# Altium PCB Kanaloa_v2.0.0_Loko.PcbDoc (part 1 of 2)
Units mil, origin at the board's own origin, x right, y up, seen from the top; angles counter-clockwise.
Board outline 8000 x 8000 mil, 4 copper layers (Top Layer, +24V, GND, Bottom Layer), stack 62 mil thick; 64 components, 140 nets, 806 pads, 72 vias.
Unrouted connection lines stored in the file: 9.
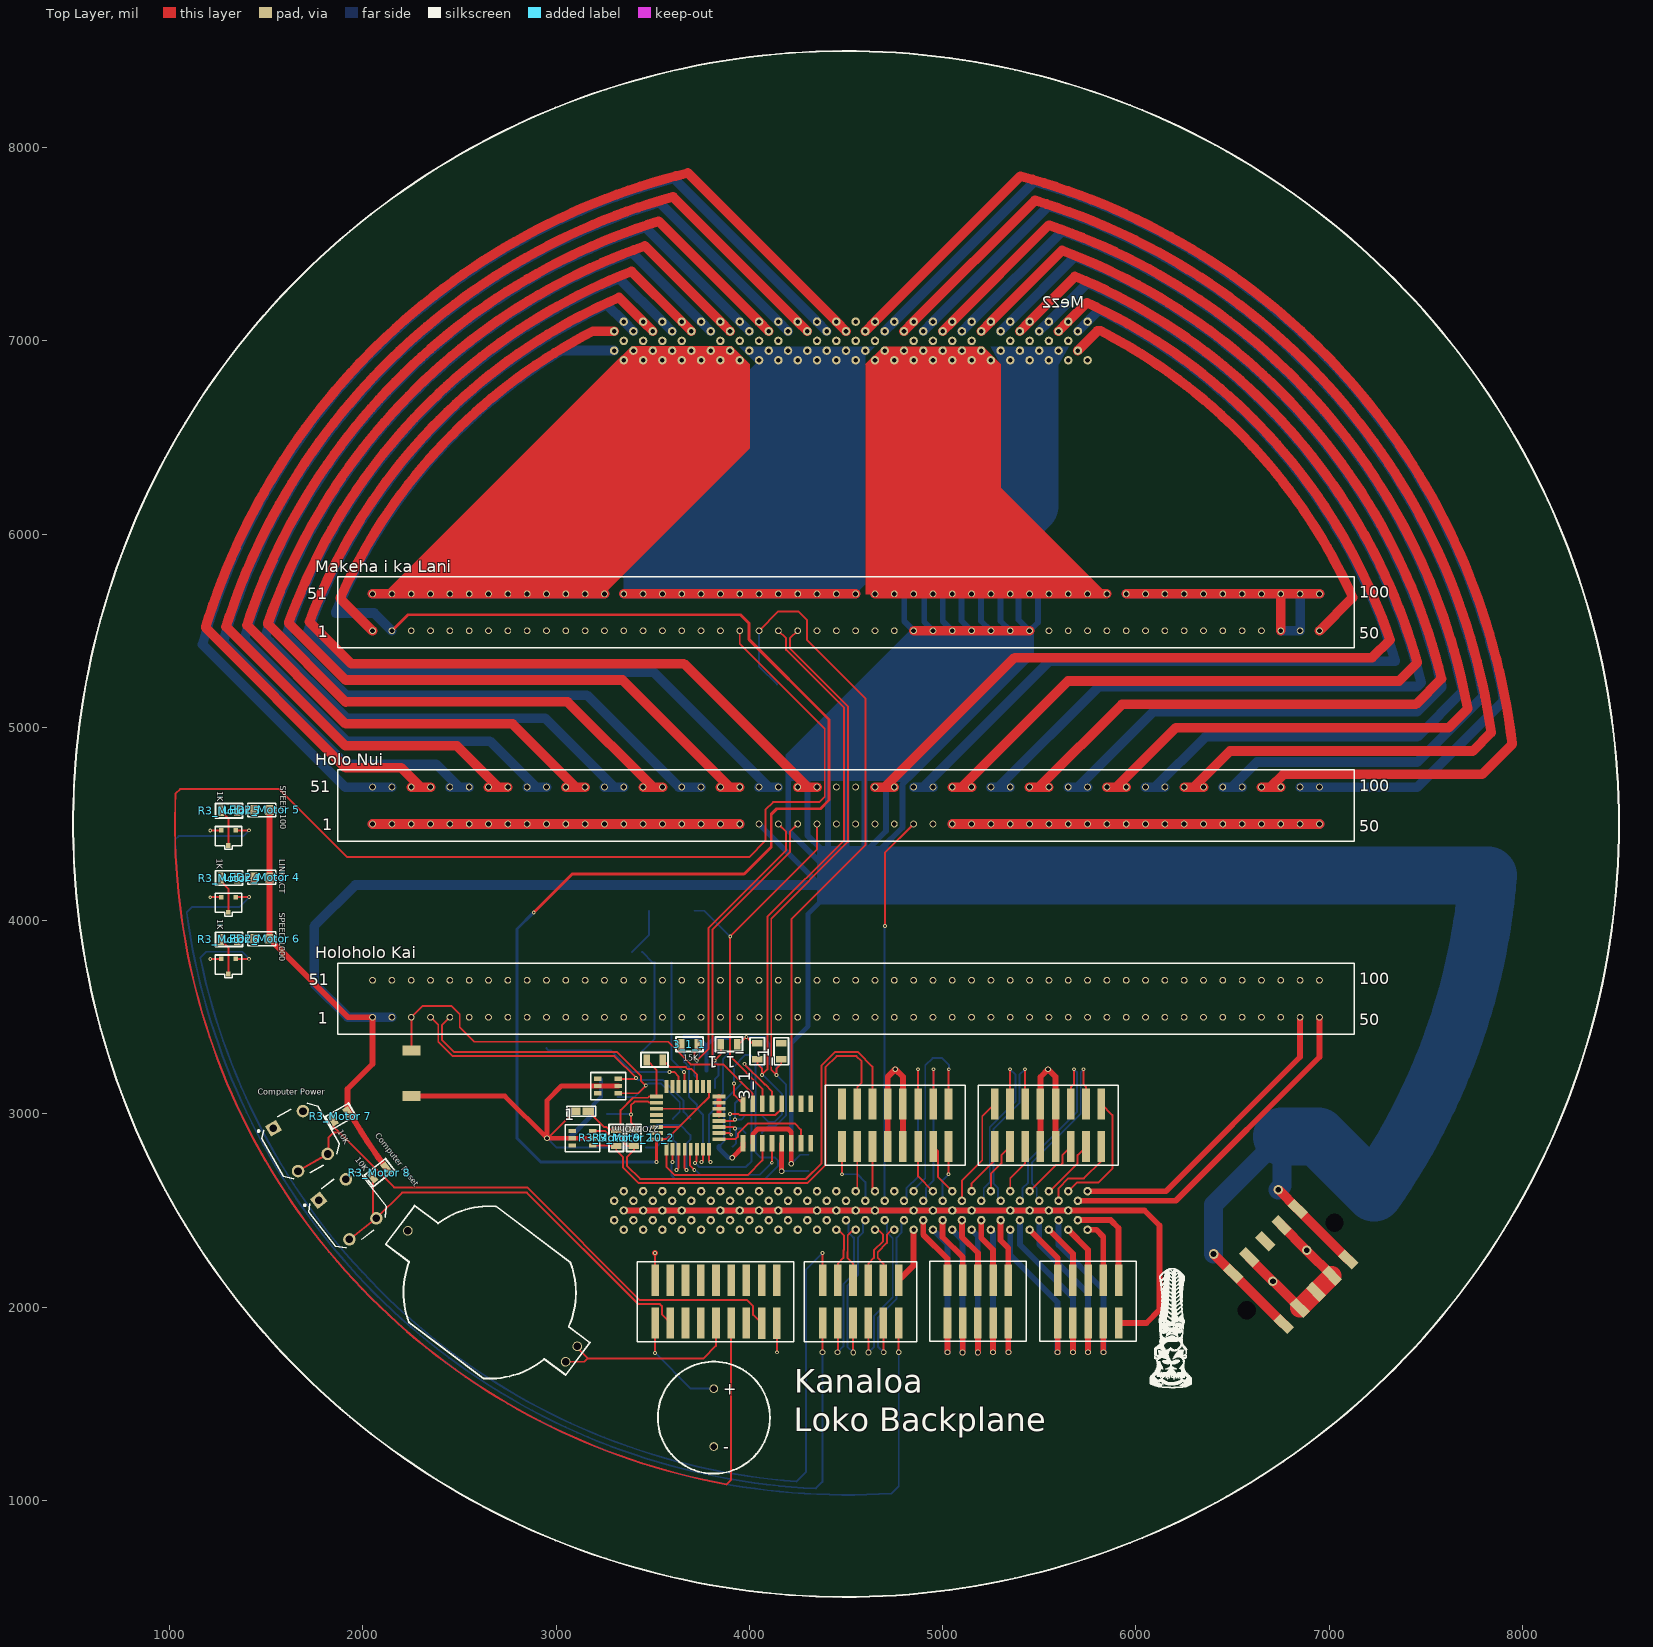
[diagram p0: Top Layer view]
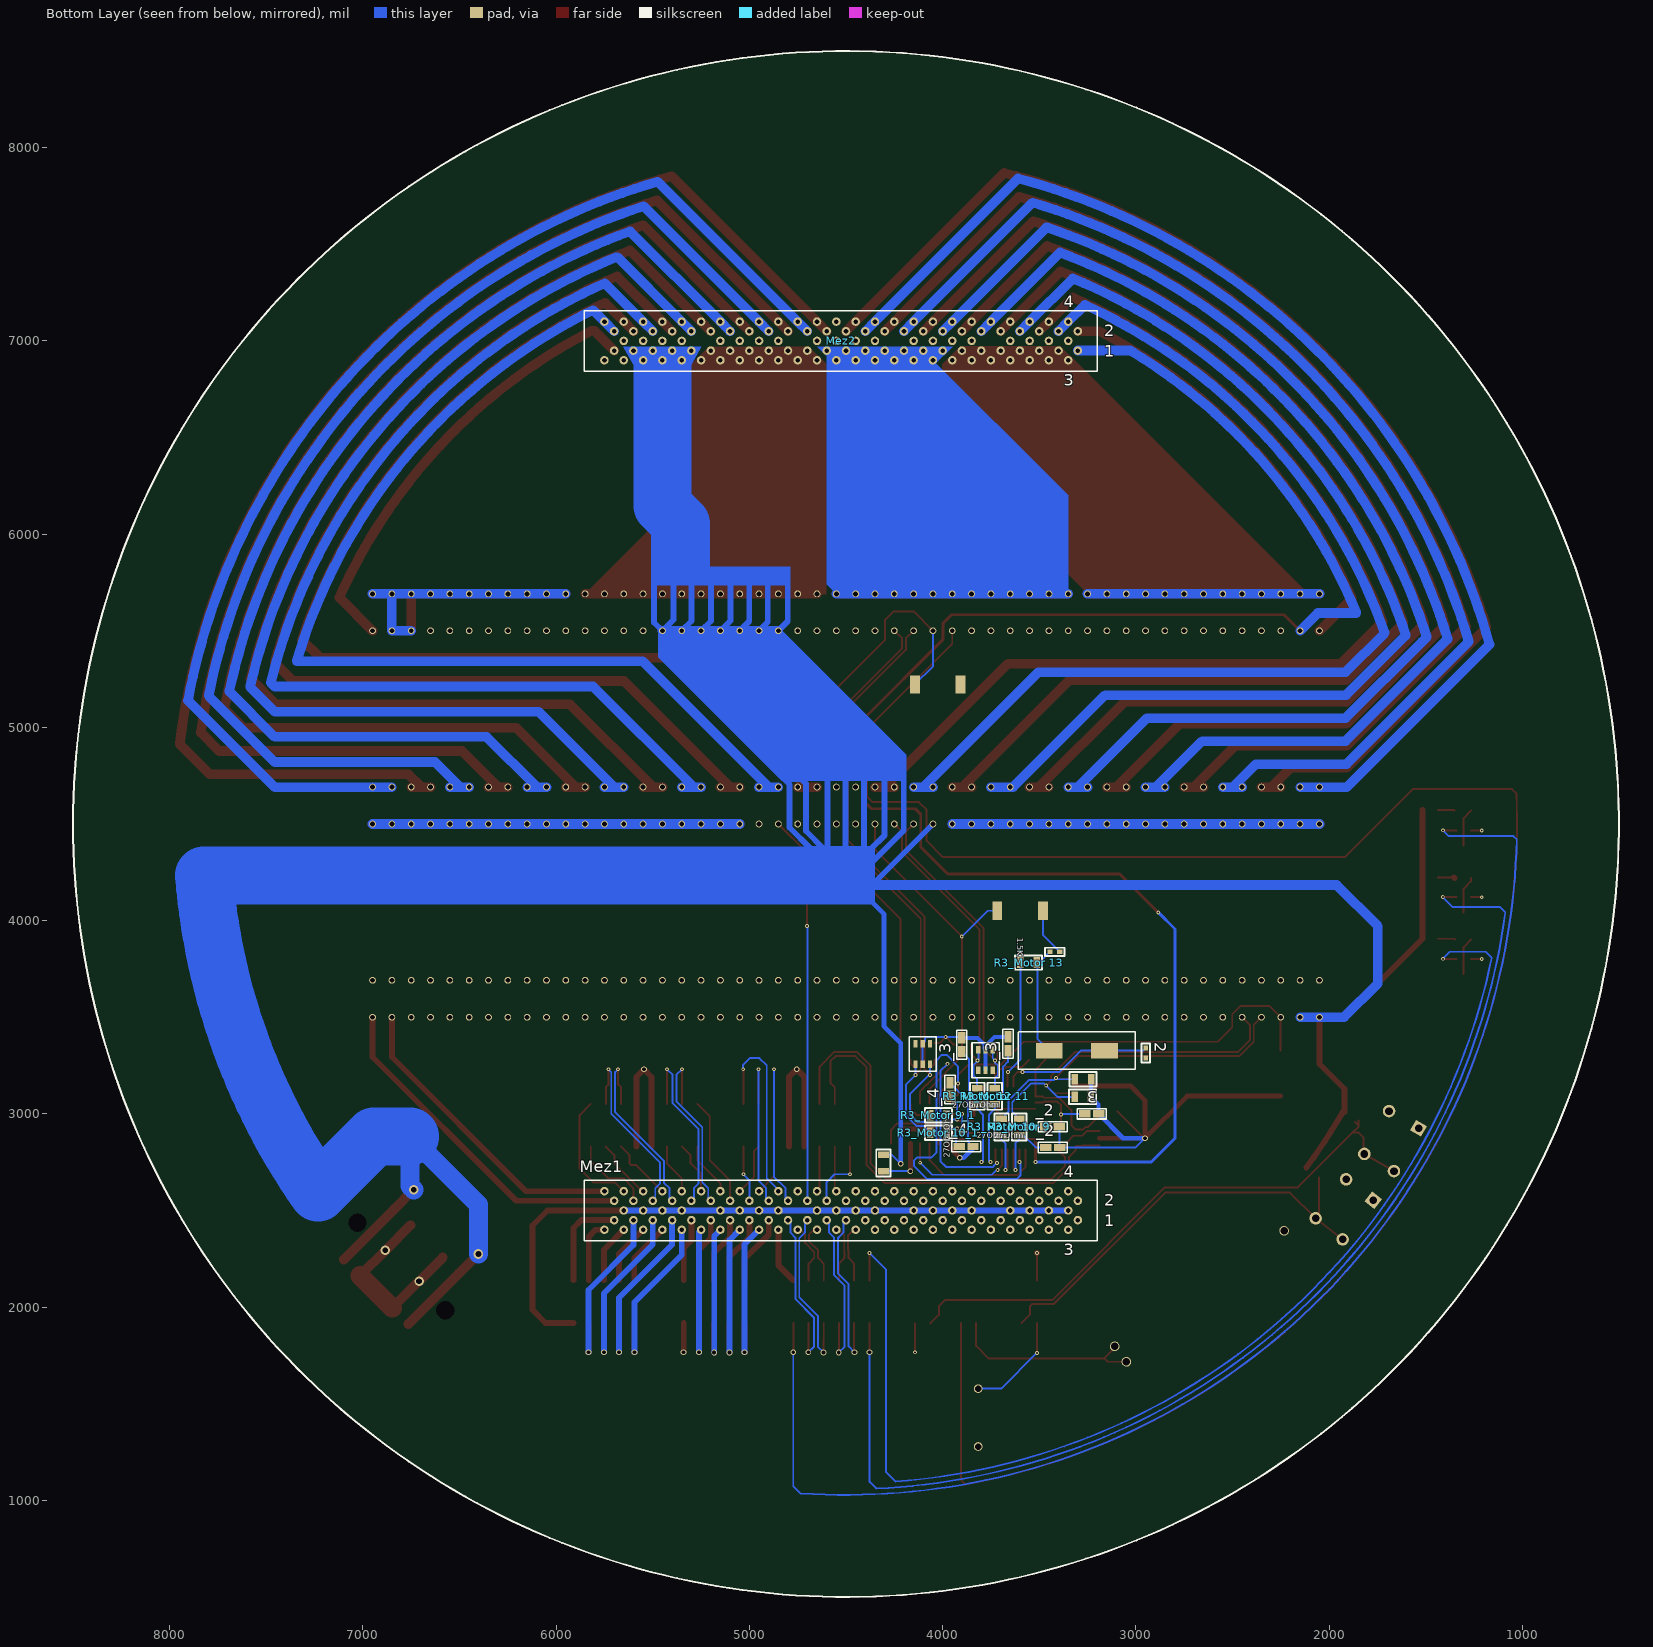
[diagram p1: Bottom Layer view, seen from below]
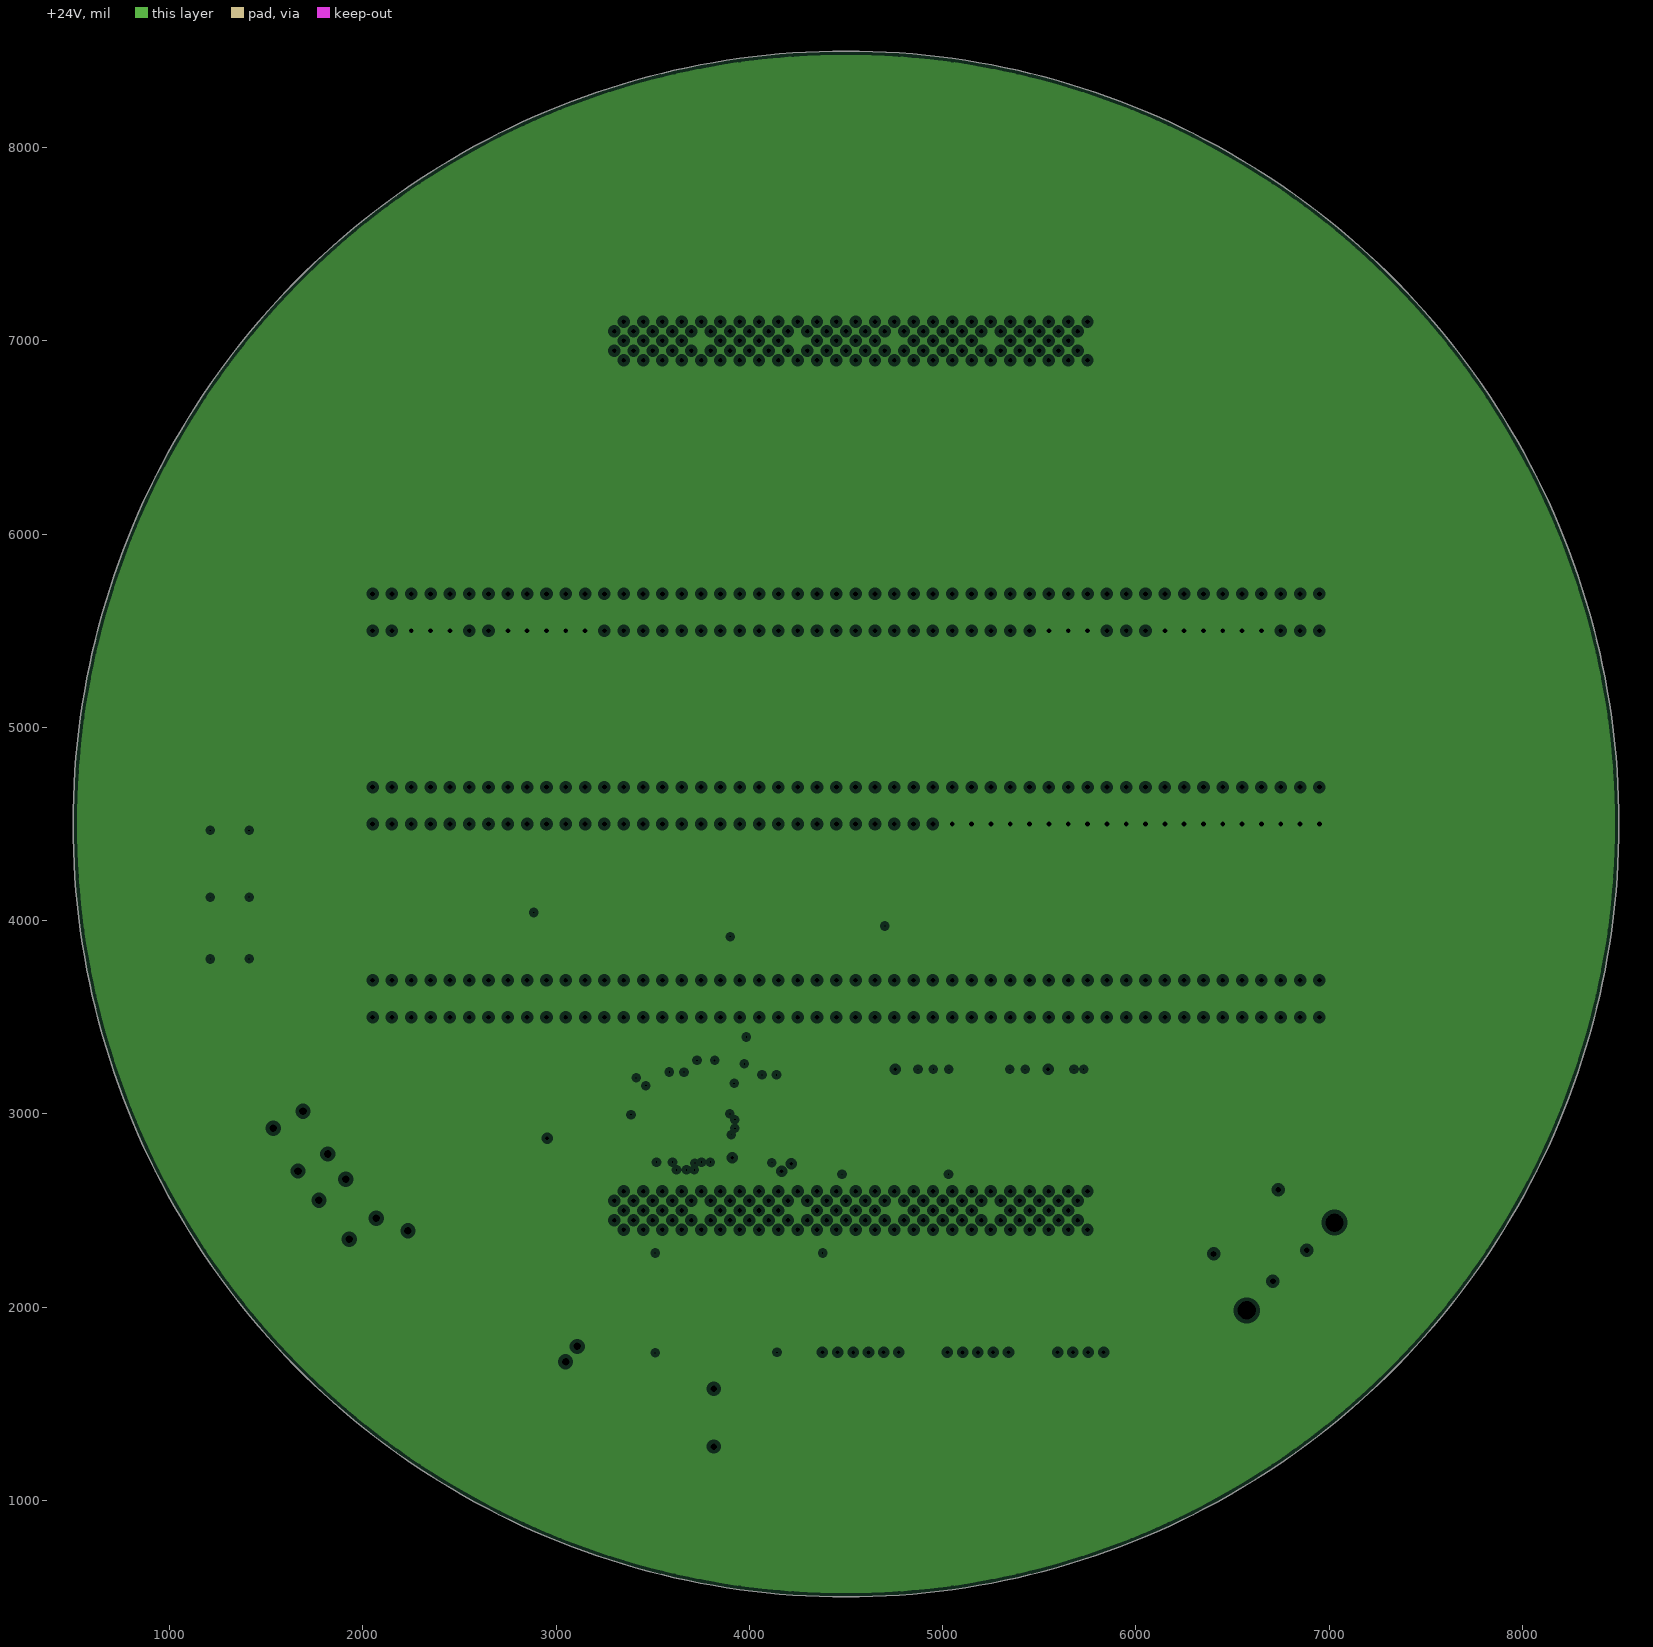
[diagram p2: +24V, clearances drawn from the general rule]
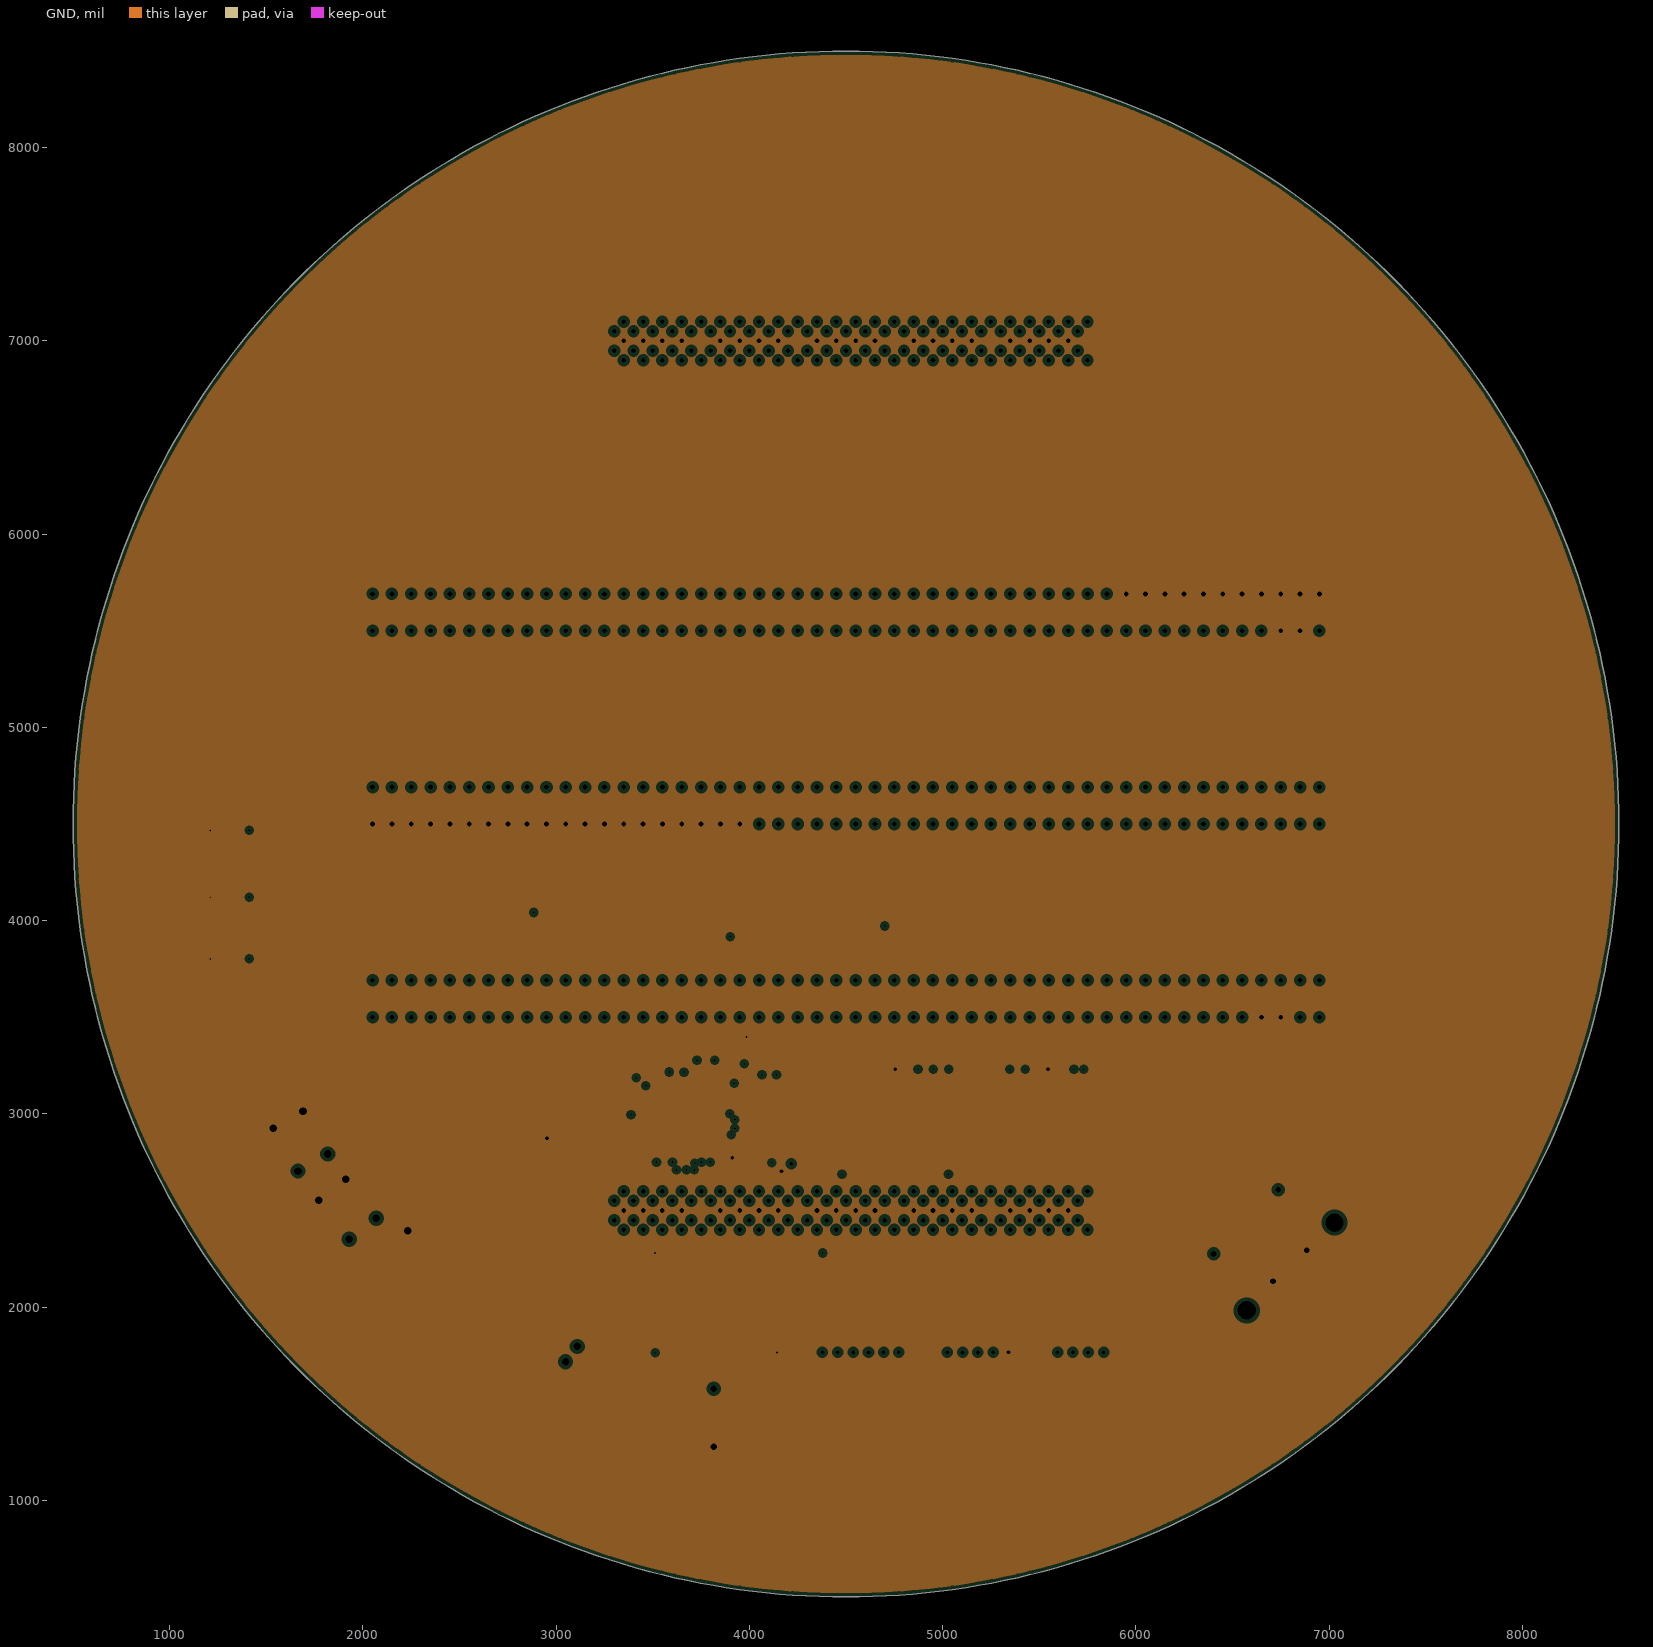
[diagram p3: GND, clearances drawn from the general rule]
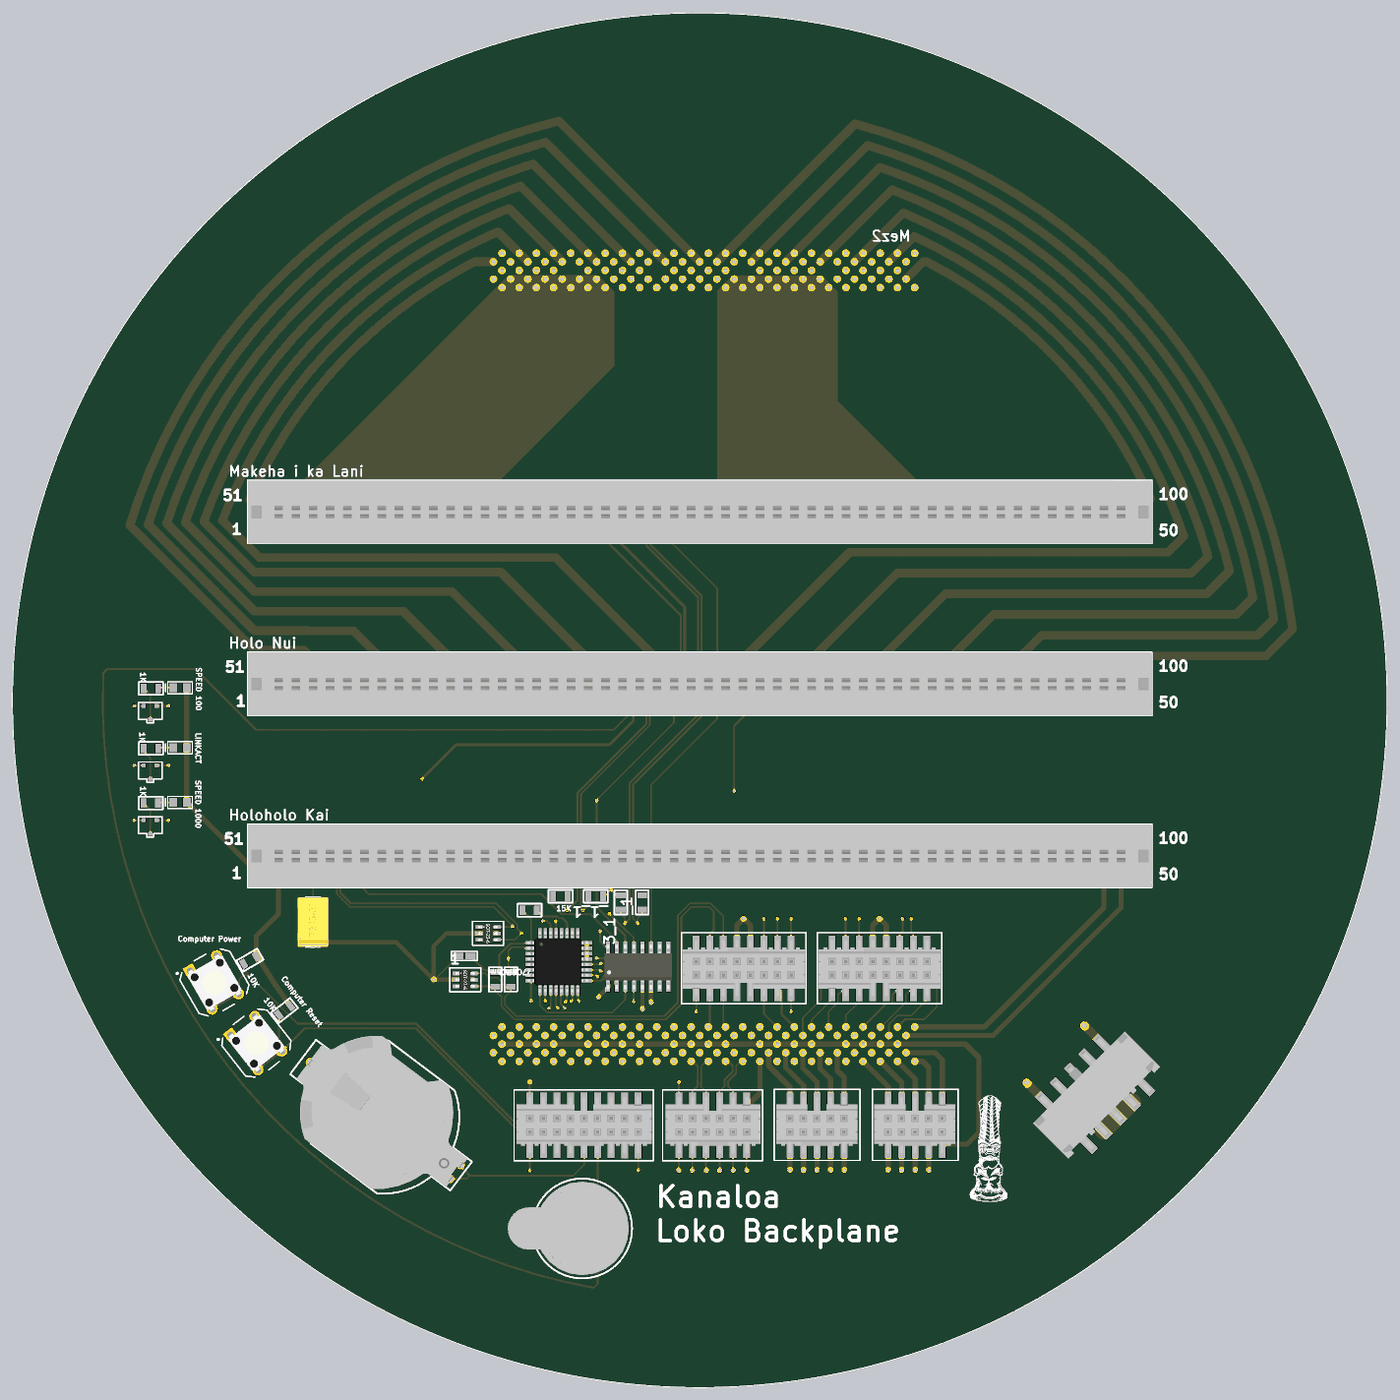
[diagram p5: 3D render of the assembled board from above, using the file's embedded part models]

## Layer stack, top to bottom
Top Layer: signal copper 1.4
Dielectric: core 8.2, FR-4, Dk 4.8
+24V: plane copper 1.4, net +24V
Dielectric: prepreg 40, FR-4, Dk 4.8
GND: plane copper 1.4, net GND
Dielectric: core 8.2, FR-4, Dk 4.8
Bottom Layer: signal copper 1.4

## Board outline
4500,500 cw(c4500,4500) 500,4500 cw(c4500,4500) 4500,8500 cw(c4500,4500) 8500,4500 cw(c4500,4500)

## Design rules (kind name [scope] priority, off if disabled: settings)
Clearance [All] p1: gap=10
DiffPairsRouting [All] p1: maxlimit=10 minlimit=10 mostfreqgap=10 maxuncoupledlength=500
PlaneClearance [All] p1: clearance=20
PlaneConnect [All] p1: planeconnectstyle=Relief reliefexpansion=20 reliefentries=4 reliefconductorwidth=10 reliefairgap=10
PolygonConnect [All] p1: connectstyle=Relief reliefconductorwidth=10 reliefentries=4 polygonreliefangle="90 Angle"
RoutingVias [All] p1: holewidth=28 width=50 viastyle="Through Hole" minholewidth=28 minwidth=50 maxholewidth=28 maxwidth=50
SilkscreenOverComponentPads [All] p1: minsilkscreentomaskgap=10
SolderMaskExpansion [All] p1: expansion=4
Width [All] p1: maxlimit=1000 minlimit=10 preferedwidth=10
24 further rules are at their usual default settings.

## Classes and differential pairs
differential pair USB_6: +USB_DP_6 -USB_DM_6
differential pair USB_7: +USB_DP_7 -USB_DM_7
differential pair USB_8: +USB_DP_8 -USB_DM_8
differential pair D: +DP3 -DM3
differential pair D2: +DP2 -DM2
differential pair D1: +DP1 -DM1
differential pair D0: +DP0 -DM0
differential pair LAN3: +LAN3 -LAN3#
differential pair LAN2: +LAN2 -LAN2#
differential pair LAN1: +LAN1 -LAN1#
differential pair LAN0: +LAN0 -LAN0#
differential pair USB_5: +USB_DP_5 -USB_DM_5
differential pair USB_4: +USB_DP_4 -USB_DM_4
differential pair USB_3: +USB_DP_3 -USB_DM_3
differential pair USB_2: +USB_DP_2 -USB_DM_2
differential pair USB_HK: +USBDP_HK -USBDM_HK
differential pair USB_HN: +USBDP_HN -USBDM_HN
differential pair USB_ML: +USBDP_ML -USBDM_ML
differential pair USB_1: +USB_DP_1 -USB_DM_1

## Components (designator, comment, footprint, x,y, rotation, side; value= is the part's Value field where it differs from the comment)
1 "" SN75240 3136,2874 r0 top
2 "27pF" "0402 (1005) CAPACITOR" 2949,3315 r270 bottom
3 "15K" "R 0805 (2012) RESISTOR" 3274,3179 r0 bottom
3_1 "15K" "R 0805 (2012) RESISTOR" 4041,3324 r90 top
3_1_1 "15K" "R 0805 (2012) RESISTOR" 3690,3360 r0 top
_1 "15K" "R 0805 (2012) RESISTOR" 4165,3324 r90 top
_1_1 "15K" "R 0805 (2012) RESISTOR" 3895,3360 r180 top
_2 "22pF" "0603 (1608) Capacitor" 3430,2826 r180 bottom
_2 "22pF" "0603 (1608) Capacitor" 3431,2933 r180 bottom
_3 "22pF" "0603 (1608) Capacitor" 3662,3363 r90 bottom
_3 "22pF" "0603 (1608) Capacitor" 3901,3358 r90 bottom
_4 "22pF" "0603 (1608) Capacitor" 3962,3126 r90 bottom
_4 "22pF" "0603 (1608) Capacitor" 3878,2831 r180 bottom
"Holo Nui" "" "AMP 5645235-3" 4500,4500 r0 top
"Holoholo Kai" "" "AMP 5645235-3" 4500,3500 r0 top
"LED2_Motor 4" "LINKACT" "LED 0805" 1477,4224 r0 top (schematic designator LED2)
"LED2_Motor 5" "SPEED 100" "LED 0805" 1477,4572.5 r0 top (schematic designator LED2)
"LED2_Motor 6" "SPEED 1000" "LED 0805" 1477,3906 r0 top (schematic designator LED2)
"Makeha i ka Lani" "" "AMP 5645235-3" 4500,5500 r0 top
Mez1 "" "TE 5536279-4" 4500,2500 r180 bottom
Mez2 "" "TE 5536279-4" 4500,7000 r180 bottom
"R3_Motor 4" "1K" "R 0805 (2012) RESISTOR" 1308,4220.53 r180 top (schematic designator R3)
"R3_Motor 5" "1K" "R 0805 (2012) RESISTOR" 1308,4569.03 r180 top (schematic designator R3)
"R3_Motor 6" "1K" "R 0805 (2012) RESISTOR" 1306.68,3902.53 r180 top (schematic designator R3)
"R3_Motor 7" "10K" "R 0805 (2012) RESISTOR" 1884,2988 r210 top (schematic designator R3)
"R3_Motor 8" "10K" "R 0805 (2012) RESISTOR" 2085,2696 r218 top (schematic designator R3)
"R3_Motor 9" "27Ohm" "R 0805 (2012) RESISTOR" 3604,2932 r270 bottom (schematic designator R3)
"R3_Motor 9_1" "27Ohm" "R 0805 (2012) RESISTOR" 4022,2993 r180 bottom (schematic designator R3)
"R3_Motor 9_2" "27Ohm" "R 0805 (2012) RESISTOR" 3311,2876 r90 top (schematic designator R3)
"R3_Motor 10" "27Ohm" "R 0805 (2012) RESISTOR" 3695,2932 r270 bottom (schematic designator R3)
"R3_Motor 10_1" "27Ohm" "R 0805 (2012) RESISTOR" 4022,2902 r180 bottom (schematic designator R3)
"R3_Motor 10_2" "27Ohm" "R 0805 (2012) RESISTOR" 3402,2876 r90 top (schematic designator R3)
"R3_Motor 11" "27Ohm" "R 0805 (2012) RESISTOR" 3730,3091 r270 bottom (schematic designator R3)
"R3_Motor 12" "27Ohm" "R 0805 (2012) RESISTOR" 3821,3091 r270 bottom (schematic designator R3)
"R3_Motor 13" "1.5K" "R 0805 (2012) RESISTOR" 3555,3783 r0 bottom (schematic designator R3)
? ".1uF" "0805 (2012) Capacitor" 4306,2746 r90 bottom
? "100uF" "2917 (7343) Capacitor" 4024.99,5222 r0 bottom
? "100uF" "2917 (7343) Capacitor" 3599.02,4051 r0 bottom
? "100uF" "2917 (7343) Capacitor" 2251,3210 r90 top
? "1.5K" "R 0805 (2012) RESISTOR" 3510,3279 r0 top
? "22pF" "0603 (1608) Capacitor" 3228,3000 r0 bottom
? "22pF" "0603 (1608) Capacitor" 3131,3013 r0 top
? "15K" "R 0805 (2012) RESISTOR" 3275,3088 r0 bottom
? "27pF" "0402 (1005) CAPACITOR" 3419,3838 r0 bottom
? "" FOXDLF/060-20 3310,3327 r0 bottom
? "" SN75240 4103,3310 r270 bottom
? "" SN75240 3778,3278 r90 bottom
? "" SN75240 3269,3144 r0 top
? "" TPS2044 4121,2950 r90 top
? "" TUSB2036 3681,2979 r0 top
? "" "10PS Header Vert" 6801,2210 r45 top
? "" 120591 2656,2076 r143 top
? "" "PUI Audio AI-1433-TWR-R" 3816,1428 r0 top
? "" "FCI 18POS" 3445.11,2028.24 r0 top
? "" BC847 1304,3763 r0 top
? "" BC847 1304,4428 r0 top
? "" BC847 1304,4082 r0 top
? "" "FCI 16pos" 5820.96,2941.24 r180 top
? "" "FCI 12POS" 4311.85,2028.24 r0 top
? "" "FCI 10POS" 5595.52,2028.24 r0 top
? "" "FCI 16pos" 5030.7,2941.24 r180 top
? "" "FCI 10POS" 5025,2028.24 r0 top
? "" B3F-1000 1677,2859 r300 top
? "" B3F-1000 1921,2506 r308 top

## Footprints (in the part's own frame and the unit in brackets; to place one, negate y for a bottom-side part, rotate by r counter-clockwise, add the part's x,y. Pads: shape width x height; smd on the part's side, far side on the other; paste and mask are expansions set on the pad)
"10PS Header Vert" [mil]
  rect 50x100 smd: 1(236,-185) 2(118,-185) 3(0,-185) 4(-118,-185) 5(-236,-185) 6(236,185) 7(118,185) 8(0,185) 9(-118,185) 10(-236,185)
  round 0 hole 95: 15(321,0) 16(-321,0)
  body extent -377,-220 377,220, height 390
"0402 (1005) CAPACITOR" [mm] "0402 (1005) Capacitor"
  rect 0.7x0.6 smd: 1(-0.65,0) 2(0.65,0)
  silkscreen extent -1.28,-0.55 1.28,0.55, body extent -0.6,-0.29 0.6,0.29, height 0.51
"0603 (1608) Capacitor" [mm] "0603 (1608) Capacitor"
  rect 1.5x0.95 smd: 1(-0.9,0) 2(0.9,0)
  silkscreen extent -1.9,-0.67 1.9,0.67, body extent -0.76,-0.39 0.76,0.39, height 0.51
"0805 (2012) Capacitor" [mm] "0805 (2012) Capacitor"
  rect 0.85x1.4 smd: 1(-1.075,0) 2(1.075,0)
  silkscreen extent -1.78,-0.95 1.78,0.95, body extent -1.19,-0.65 1.19,0.65, height 0.85
"2917 (7343) Capacitor" [mil] "Tantalum Capacitor"
  rect 51x94 smd: 1(118,0) 2(-118,0)
  body extent -150,-91 150,91, height 122
120591 [mil]
  round 50 hole 38: 0(-530,50) 1(530,0) 2(-530,-50)
  silkscreen extent -571,-375 580,375, body extent -540,-375 535,375, height 262
"AMP 5645235-3" [mil] "50 Dual Pos. Card Edge Connector"
  round 35 hole 25 mask+0: 1(-2450,0) 2(-2350,0) 3(-2250,0) 4(-2150,0) 5(-2050,0) 6(-1950,0) 7(-1850,0) 8(-1750,0) 9(-1650,0) 10(-1550,0) 11(-1450,0) 12(-1350,0) 13(-1250,0) 14(-1150,0) 15(-1050,0) 16(-950,0) 17(-850,0) 18(-750,0) 19(-650,0) 20(-550,0) 21(-450,0) 22(-350,0) 23(-250,0) 24(-150,0) 25(-50,0) 26(50,0) 27(150,0) 28(250,0) 29(350,0) 30(450,0) 31(550,0) 32(650,0) 33(750,0) 34(850,0) 35(950,0) 36(1050,0) 37(1150,0) 38(1250,0) 39(1350,0) 40(1450,0) 41(1550,0) 42(1650,0) 43(1750,0) 44(1850,0) 45(1950,0) 46(2050,0) 47(2150,0) 48(2250,0) 49(2350,0) 50(2450,0) 51(-2450,191) 52(-2350,191) 53(-2250,191) 54(-2150,191) 55(-2050,191) 56(-1950,191) 57(-1850,191) 58(-1750,191) 59(-1650,191) 60(-1550,191) 61(-1450,191) 62(-1350,191) 63(-1250,191) 64(-1150,191) 65(-1050,191) 66(-950,191) 67(-850,191) 68(-750,191) 69(-650,191) 70(-550,191) 71(-450,191) 72(-350,191) 73(-250,191) 74(-150,191) 75(-50,191) 76(50,191) 77(150,191) 78(250,191) 79(350,191) 80(450,191) 81(550,191) 82(650,191) 83(750,191) 84(850,191) 85(950,191) 86(1050,191) 87(1150,191) 88(1250,191) 89(1350,191) 90(1450,191) 91(1550,191) 92(1650,191) 93(1750,191) 94(1850,191) 95(1950,191) 96(2050,191) 97(2150,191) 98(2250,191) 99(2350,191) 100(2450,191)
  silkscreen extent -2630,-89 2630,280, body extent -2629,-90 2631,278, height 600
B3F-1000 [mm] "OMRON Electronics Pushbutton Tactile SPST-NO 0.05A 24V"
  rect 1.65x1.65 hole 1: 1(-3.25,-2.25)
  round 1.65 hole 1: 2(3.25,-2.25) 3(-3.25,2.25) 4(3.25,2.25)
  silkscreen extent -4.25,-4.25 4.25,4.25, body extent -3.81,-3 3.89,3, height 4.3
BC847 [mm] "NPN Transistor"
  rect 0.6x0.6 smd: B(0.95,1) C(0,-1) E(-0.95,1)
  silkscreen extent -1.75,-1.5 1.75,1.5, body extent -1.75,-1 1.75,1.5, height 1
"FCI 10POS" [mm] "98424-G52-10ALF"
  rect 1x4.1 smd: 1(0,-2.8) 2(2,-2.8) 3(4,-2.8) 4(6,-2.8) 5(8,-2.8) 6(0,2.8) 7(2,2.8) 8(4,2.8) 9(6,2.8) 10(8,2.8)
  silkscreen extent -2.34,-5.2 10.34,5.3, body extent -2.04,-4.5 9.96,4.5, height 6.43
"FCI 12POS" [mm]
  rect 1x4.1 smd: 1(1.7,-2.8) 2(3.7,-2.8) 3(5.7,-2.8) 4(7.7,-2.8) 5(9.7,-2.8) 6(11.7,-2.8) 7(1.7,2.8) 8(3.7,2.8) 9(5.7,2.8) 10(7.7,2.8) 11(9.7,2.8) 12(11.7,2.8)
  silkscreen extent -0.71,-5.25 14.07,5.25, body extent -0.28,-4.5 13.72,4.5, height 6.43
"FCI 16pos" [mm] "98424"
  rect 1x4.1 smd: 1(0,-2.8) 2(2,-2.8) 3(4,-2.8) 4(6,-2.8) 5(8,-2.8) 6(10,-2.8) 7(12,-2.8) 8(14,-2.8) 9(0,2.8) 10(2,2.8) 11(4,2.8) 12(6,2.8) 13(8,2.8) 14(10,2.8) 15(12,2.8) 16(14,2.8)
  silkscreen extent -2.21,-5.25 16.18,5.25, body extent -2.01,-4.5 15.99,4.5, height 6.43
"FCI 18POS" [mm]
  rect 1x4.1 smd: 1(1.7,-2.8) 2(3.7,-2.8) 3(5.7,-2.8) 4(7.7,-2.8) 5(9.7,-2.8) 6(11.7,-2.8) 7(13.7,-2.8) 8(15.7,-2.851) 9(17.7,-2.851) 10(1.7,2.8) 11(3.7,2.8) 12(5.7,2.8) 13(7.7,2.8) 14(9.7,2.8) 15(11.7,2.8) 16(13.7,2.8) 17(15.7,2.8) 18(17.7,2.8)
  silkscreen extent -0.64,-5.25 19.94,5.25, body extent -0.31,-4.5 19.69,4.5, height 6.43
FOXDLF/060-20 [mm] "6.0 MHZ Surface Mount Crystal"
  rect 3.5x2 smd: 1(-3.75,0) 2(3.5,0)
  silkscreen extent -7.82,-2.46 7.57,2.44, body extent -7.65,-2.25 7.35,2.25, height 2.52
"LED 0805" [mm]
  rect 1.15x1.3 smd: 1(-1,0) 2(1,0)
  silkscreen extent -2.12,-0.9 1.83,0.9, body extent -1,-0.63 1,0.62, height 0.8
"PUI Audio AI-1433-TWR-R" [mil] "Active Piezo Buzzer 3.3kHz , 3-18V"
  round 45 hole 33.6: 1(0,149.61) 2(0,-149.61)
  silkscreen extent -290,-290 290,290, body extent -433,-272 272,272, height 302
"R 0805 (2012) RESISTOR" [mm] "0805 (2012) Resistor"
  rect 0.85x1.4 smd: 1(-1.075,0) 2(1.075,0)
  silkscreen extent -1.78,-0.95 1.78,0.95, body extent -1.19,-0.65 1.19,0.65, height 0.85
SN75240 [mm]
  rect 1x0.55 smd: 1(-1.35,0.95) 2(-1.35,0) 3(-1.35,-0.95) 4(1.35,-0.95) 5(1.35,0) 6(1.35,0.95)
  silkscreen extent -2.29,-1.78 2.29,1.78, body extent -1.43,-1.5 1.38,1.5, height 0.86
"TE 5536279-4" [mil] "Mezzanine Connector"
  round 44 hole 24 mask+0: 1(1200,-50) 2(1200,50) 3(1150,-100) 4(1150,100) 5(1100,-50) 6(1100,50) 7(1050,-100) 8(1050,100) 9(1000,-50) 10(1000,50) 11(950,-100) 12(950,100) 13(900,-50) 14(900,50) 15(850,-100) 16(850,100) 17(800,-50) 18(800,50) 19(750,-100) 20(750,100) 21(700,-50) 22(700,50) 23(650,-100) 24(650,100) 25(600,-50) 26(600,50) 27(550,-100) 28(550,100) 29(500,-50) 30(500,50) 31(450,-100) 32(450,100) 33(400,-50) 34(400,50) 35(350,-100) 36(350,100) 37(300,-50) 38(300,50) 39(250,-100) 40(250,100) 41(200,-50) 42(200,50) 43(150,-100) 44(150,100) 45(100,-50) 46(100,50) 47(50,-100) 48(50,100) 49(0,-50) 50(0,50) 51(-50,-100) 52(-50,100) 53(-100,-50) 54(-100,50) 55(-150,-100) 56(-150,100) 57(-200,-50) 58(-200,50) 59(-250,-100) 60(-250,100) 61(-300,-50) 62(-300,50) 63(-350,-100) 64(-350,100) 65(-400,-50) 66(-400,50) 67(-450,-100) 68(-450,100) 69(-500,-50) 70(-500,50) 71(-550,-100) 72(-550,100) 73(-600,-50) 74(-600,50) 75(-650,-100) 76(-650,100) 77(-700,-50) 78(-700,50) 79(-750,-100) 80(-750,100) 81(-800,-50) 82(-800,50) 83(-850,-100) 84(-850,100) 85(-900,-50) 86(-900,50) 87(-950,-100) 88(-950,100) 89(-1000,-50) 90(-1000,50) 91(-1050,-100) 92(-1050,100) 93(-1100,-50) 94(-1100,50) 95(-1150,-100) 96(-1150,100) 97(-1200,-50) 98(-1200,50) 99(-1250,-100) 100(-1250,100) GND(-1150,0) GND(-1050,0) GND(-950,0) GND(-850,0) GND(-650,0) GND(-550,0) GND(-450,0) GND(-350,0) GND(-150,0) GND(-50,0) GND(50,0) GND(150,0) GND(350,0) GND(450,0) GND(550,0) GND(650,0) GND(850,0) GND(950,0) GND(1050,0) GND(1150,0)
  silkscreen extent -1355,-156 1301,156, body extent -1347,-141 1293,144, height 320
TPS2044 [mm] "TI QUAD POWER DISTRIBUTION SWITCHES"
  rect 2.2x0.6 smd: 1(-2.6,3.912) 2(-2.6,2.642) 3(-2.6,1.372) 4(-2.6,0.102) 5(-2.6,-1.168) 6(-2.6,-2.438) 7(-2.6,-3.708) 8(-2.6,-4.978) 9(2.6,-4.978) 10(2.6,-3.708) 11(2.6,-2.438) 12(2.6,-1.168) 13(2.6,0.102) 14(2.6,1.372) 15(2.6,2.642) 16(2.6,3.912)
  body extent -3.33,-5.53 3.27,4.47, height 1.8
TUSB2036 [mil] "USB HUB Controller IC (TI)"
  rect 66x20 smd: 1(-162,110.24) 2(-162,78.74) 3(-162,47.24) 4(-162,15.75) 5(-162,-15.75) 6(-162,-47.24) 7(-162,-78.74) 8(-162,-110.24) 17(162,-110.24) 18(162,-78.74) 19(162,-47.24) 20(162,-15.75) 21(162,15.75) 22(162,47.24) 23(162,78.74) 24(162,110.24)
  rect 20x66 smd: 9(-110.24,-162) 10(-78.74,-162) 11(-47.24,-162) 12(-15.75,-162) 13(15.75,-162) 14(47.24,-162) 15(78.74,-162) 16(110.24,-162) 25(110.24,162) 26(78.74,162) 27(47.24,162) 28(15.75,162) 29(-15.75,162) 30(-47.24,162) 31(-78.74,162) 32(-110.24,162)
  body extent -183,-177 171,177, height 57

## Part data
"LED2_Motor 4" "LED2_Motor 5" "LED2_Motor 6": library part LED, "Standard LED"
"R3_Motor 4" "R3_Motor 5" "R3_Motor 6" "R3_Motor 7" "R3_Motor 8" "R3_Motor 9" "R3_Motor 9_1" "R3_Motor 9_2" "R3_Motor 10" "R3_Motor 10_1" "R3_Motor 10_2" "R3_Motor 11" "R3_Motor 12" "R3_Motor 13": library part Resistor, "Resistor"

## Via types
v1: diameter 20, hole 10, Top Layer to Bottom Layer, 47 vias
v2: diameter 30, hole 20, Top Layer to Bottom Layer, 21 vias
v3: diameter 50, hole 30, Top Layer to Bottom Layer, 4 vias

## Nets (pads, with @x,y where several pads share a name; then routed paths per layer and width w, separated by ;. In a path a pad name is that pad's centre, name@x,y a point inside that pad or via, vN(x,y) a via of type N, cw(c..) or ccw(c..) an arc to the next point about the centre after c; other vN are vias at no path point)
3.3V: ?.18@4141.96,2138.47
100c: "R3_Motor 5.2" ?.C@1304,4388.63 | length 196.3
  Top Layer w10: 1265.68,4569.03 1304,4530.71 ?.C@1304,4388.63
100r: "LED2_Motor 5.1" "R3_Motor 5.1" | length 88.7
  Top Layer w10: 1350.32,4569.03 1353.79,4572.5 1437.63,4572.5
1000c: "R3_Motor 6.2" ?.C@1304,3723.63 | length 195.3
  Top Layer w10: 1264.35,3902.53 1304,3862.89 ?.C@1304,3723.63
1000r: "LED2_Motor 6.1" "R3_Motor 6.1" | length 90.1
  Top Layer w10: 1349,3902.53 1352.47,3906 1437.63,3906
+3.3V: "Makeha i ka Lani.2" ?.3@3519,3026.24 ?.6@3519,2931.76 ?.8@3519,2868.76 ?.25 Mez2.1 | length 10104.7
  Top Layer w10: ?.8@3519,2868.76 3572.76,2868.76 3635,2931 ; ?.6@3519,2931.76 3634.24,2931.76 3635,2931 ; ?.3@3519,3026.24 3730.24,3026.24 ; ?.25@3791.24,3141 3791.24,3087.24 3730.24,3026.24 ; 3635,2931 3730.24,3026.24
  Top Layer w15: 2150,5500 2233,5583 3954,5583 3999,5538 3999,5454 4412.5,5040.5 4412.5,4623.5 4368,4579 4142,4579 4113,4550 4113,4381 3973,4241 3083,4241 v1(2884,4042) ; v1(3519,2750) ?.8@3519,2868.76
  Bottom Layer w15: v1@2884,4043 2798,3957 2798,2874 2922,2750 v1(3519,2750)
  Bottom Layer w50: 2150,5500 2058.16,5591.84 1859.13,5591.84 cw(c4500,4500) 3016.67,6942.54 ; 3029.02,6950 Mez2.1@3300,6950
+5V: "Holo Nui.21" "Holoholo Kai.1" "Holoholo Kai.2" "LED2_Motor 4.2" "LED2_Motor 5.2" "LED2_Motor 6.2" "Makeha i ka Lani.29" "Makeha i ka Lani.30" "Makeha i ka Lani.31" "Makeha i ka Lani.32" "Makeha i ka Lani.33" "Makeha i ka Lani.34" "Makeha i ka Lani.35" "R3_Motor 7.1" "R3_Motor 8.1" ?.1@7098.69,2246.06 ?.2@4017,2847.64 ?.2@4306,2788.32 ?.5@6764.94,1912.31 ?.6@4217,2847.64 ?.6@6837.06,2507.69 ?.10@6503.31,2173.94 Mez2.81 Mez2.83 Mez2.85 Mez2.87 Mez2.89 Mez2.91 Mez2.93 | length 30673.5
  Top Layer w25: ?.2@4017,2847.64 4017,2894.5 4044,2921.5 4201.5,2921.5 4217,2906 ?.6@4217,2847.64 v2(4217,2742)
  Top Layer w30: 1516.37,4572.5 1516.37,4224 1516.37,3906 1922.37,3500 2050,3500 2050,3257.81 1920.65,3128.47 1920.65,3009.16 ; 1926.82,3012.7 ccw(c4500,4500) 2118.35,2722.06
  Top Layer w50: 4850,5500 4950,5500 5050,5500 5150,5500 5250,5500 5350,5500 5450,5500 ; v3(6402.25,2275) ?.10@6503.31,2173.94 ?.5@6764.94,1912.31 ; v3(6737,2607.75) ?.6@6837.06,2507.69 ?.1@7098.69,2246.06
  Bottom Layer w10: v2(4217,2742) 4263.32,2788.32 ?.2@4306,2788.32
  Bottom Layer w25: v2(4217,2742) 4217,3366 4304,3453 4304,4035 4503,4234
  Bottom Layer w30: 4050,4500 4366,4184 ; 4368,4299 4201,4466 4201,4725 4516,5040 4590,5040 5050,5500 5001,5549 5001,5778 ; 4372,4370 4300,4442 4300,4726 4556,4982 4632,4982 5150,5500 5098,5552 5098,5783 ; 4407,4294 4407,4746 4582,4921 4671,4921 5250,5500 5199,5551 5199,5791 ; 4503,4213 4503,4234 4503,4756 4600,4853 4703,4853 5350,5500 5300,5550 5300,5813 ; 4596,4369 4596,4737 4643,4784 4734,4784 5450,5500 ; 4621,4377 4707.5,4463.5 4707.5,4708.6 4732.4,4733.5 4820,4733.5 ; 4645,4371 4682.6,4371 ; 4682.6,4372 4792.5,4481.9 4792.5,4704.21 5451,5362.71 5450,5363.71 5450,5500 ; 4801,5745 4801,5549 4850,5500 ; 4905,5768 4905,5545 4950,5500 ; 5392.5,5766 5392.5,5557.5 5450,5500 ; 5493,5794 5493,5543 5450,5500
  Bottom Layer w50: 2150,3500 2050,3500 1923,3500 1748,3675 1748,3971 1961,4184 4366,4184 ; 4850,5500 4950,5500 5050,5500 5150,5500 5250,5500 5350,5500 5450,5500 ; 6737,2864 6756,2883
  Bottom Layer w100: v3(6402.25,2275) 6402.25,2529.25 6737,2864 ; v3(6737,2607.75) 6756,2626.75 6756,2883
  Bottom Layer w300: 4503,4234 7821,4234 ; 5354,5903 5354,6052 5450,6148 5450,6822 ; 6756,2883 6941.83,2883 7232.63,2592.2 ccw(c4500,4500) 7822,4233.01
+12V: "Makeha i ka Lani.50" Mez2.97 | length 2338.3
  Top Layer w50: Mez2.97@5700,6950 5801.84,7051.84 5817.88,7051.84 cw(c4500,4500) 7122.03,5672.03 6950,5500
+24V: "Holo Nui.31" "Holo Nui.32" "Holo Nui.33" "Holo Nui.34" "Holo Nui.35" "Holo Nui.36" "Holo Nui.37" "Holo Nui.38" "Holo Nui.39" "Holo Nui.40" "Holo Nui.41" "Holo Nui.42" "Holo Nui.43" "Holo Nui.44" "Holo Nui.45" "Holo Nui.46" "Holo Nui.47" "Holo Nui.48" "Holo Nui.49" "Holo Nui.50" "Makeha i ka Lani.3" "Makeha i ka Lani.4" "Makeha i ka Lani.5" "Makeha i ka Lani.8" "Makeha i ka Lani.9" "Makeha i ka Lani.10" "Makeha i ka Lani.11" "Makeha i ka Lani.12" "Makeha i ka Lani.36" "Makeha i ka Lani.37" "Makeha i ka Lani.38" "Makeha i ka Lani.42" "Makeha i ka Lani.43" "Makeha i ka Lani.44" "Makeha i ka Lani.45" "Makeha i ka Lani.46" "Makeha i ka Lani.47" | length 3800
  Top Layer w50: 5050,4500 5150,4500 5250,4500 5350,4500 5450,4500 5550,4500 5650,4500 5750,4500 5850,4500 5950,4500 6050,4500 6150,4500 6250,4500 6350,4500 6450,4500 6550,4500 6650,4500 6750,4500 6850,4500 6950,4500
  Bottom Layer w50: 5050,4500 5150,4500 5250,4500 5350,4500 5450,4500 5550,4500 5650,4500 5750,4500 5850,4500 5950,4500 6050,4500 6150,4500 6250,4500 6350,4500 6450,4500 6550,4500 6650,4500 6750,4500 6850,4500 6950,4500
+24VReg: "Makeha i ka Lani.1" Mez2.2 | length 2287.3
  Top Layer w50: 2050,5500 1881.92,5668.08 cw(c4500,4500) 3189.95,7050 Mez2.2@3300,7050
BAT1: "Makeha i ka Lani.51" "Makeha i ka Lani.52" "Makeha i ka Lani.53" "Makeha i ka Lani.54" "Makeha i ka Lani.55" "Makeha i ka Lani.56" "Makeha i ka Lani.57" "Makeha i ka Lani.58" "Makeha i ka Lani.59" "Makeha i ka Lani.60" "Makeha i ka Lani.61" "Makeha i ka Lani.62" "Makeha i ka Lani.63" Mez2.3 Mez2.5 Mez2.7 Mez2.9 Mez2.11 Mez2.13 Mez2.15 Mez2.17 Mez2.19 Mez2.21 Mez2.23 Mez2.25 Mez2.27 | length 2400
  Top Layer w50: 2050,5691 2150,5691 2250,5691 2350,5691 2450,5691 2550,5691 2650,5691 2750,5691 2850,5691 2950,5691 3050,5691 3150,5691 3250,5691
  Bottom Layer w50: 2050,5691 2150,5691 2250,5691 2350,5691 2450,5691 2550,5691 2650,5691 2750,5691 2850,5691 2950,5691 3050,5691 3150,5691 3250,5691
BAT2: "Makeha i ka Lani.64" "Makeha i ka Lani.65" "Makeha i ka Lani.66" "Makeha i ka Lani.67" "Makeha i ka Lani.68" "Makeha i ka Lani.69" "Makeha i ka Lani.70" "Makeha i ka Lani.71" "Makeha i ka Lani.72" "Makeha i ka Lani.73" "Makeha i ka Lani.74" "Makeha i ka Lani.75" "Makeha i ka Lani.76" Mez2.29 Mez2.31 Mez2.33 Mez2.35 Mez2.37 Mez2.39 Mez2.41 Mez2.43 Mez2.45 Mez2.47 Mez2.49 Mez2.51 Mez2.53 | length 2400
  Top Layer w50: 3350,5691 3450,5691 3550,5691 3650,5691 3750,5691 3850,5691 3950,5691 4050,5691 4150,5691 4250,5691 4350,5691 4450,5691 4550,5691
  Bottom Layer w50: 3350,5691 3450,5691 3550,5691 3650,5691 3750,5691 3850,5691 3950,5691 4050,5691 4150,5691 4250,5691 4350,5691 4450,5691 4550,5691
BATT: ?.0 ?.2@3109.37,1796.97 ?.5@3827,1918 | length 1015
  Top Layer w10: ?.0@3049.19,1717.11 3145.39,1717.11 3163.28,1735 ; ?.2@3109.37,1796.97 3109.37,1788.92 3163.28,1735 ; ?.5@3827,1918 3827,1799 3763,1735 3163.28,1735
Com1_5v: ?.10@5910.48,2138.47 Mez1.97 | length 498.3
  Top Layer w30: Mez1.97@5700,2450 5870,2450 5910.48,2409.52 ?.10@5910.48,2138.47
Com2_5v: ?.10@5339.96,2138.47 Mez1.81 | length 328.1
  Top Layer w30: Mez1.81@5300,2450 5300,2346 5339.96,2306.04 ?.10@5339.96,2138.47
CTS: ?.8@5753,2138.47 Mez1.95 | length 304.2
  Top Layer w30: Mez1.95@5650,2400 5753,2297 ?.8@5753,2138.47
CTS_2: ?.8@5182.48,2138.47 Mez1.73 | length 345.7
  Top Layer w30: Mez1.73@5100,2450 5100,2362 5182.48,2279.52 ?.8@5182.48,2138.47
DCD: ?.1@5595.52,1918 Mez1.83 | length 887.7
  Top Layer w30: v2(5595,1766) 5595.52,1766.52 ?.1@5595.52,1918
  Bottom Layer w30: Mez1.83@5350,2400 5350,2270 5595,2025 v2(5595,1766)
DCD_2: ?.1@5025,1918 Mez1.67 | length 816.6
  Top Layer w30: v2(5024.78,1766.22) 5025,1766.44 ?.1@5025,1918
  Bottom Layer w30: Mez1.67@4950,2400 5024.78,2325.22 v2(5024.78,1766.22)
DM0: "R3_Motor 10_2.2" ?.2@3263.43,3000 ?.2@3519,3057.74 | length 399.9
  Top Layer w10: 3402,2918.32 3402,2941 3387,2956 v1(3387,2996) 3387,3044.49 3406,3063.49 3475.25,3063.49 3481,3057.74 ?.2@3519,3057.74
  Bottom Layer w10: ?.2@3263.43,3000 3383,3000 v1(3387,2996)
DM1: "R3_Motor 9.2" ?.11@3633.76,2817 _2.1@3465.43,2826 | length 463.9
  Top Layer w10: v1(3623,2710) 3633.76,2720.76 ?.11@3633.76,2817
  Bottom Layer w10: _2.1@3465.43,2826 3518,2826 3581.68,2889.68 3604,2889.68 3604,2867 3623,2848 v1(3623,2710)
DM2: "R3_Motor 11.2" ?.15@3759.74,2817 _3.1@3662,3327.57 | length 693.8
  Top Layer w10: v1(3752,2750) 3759.74,2757.74 ?.15@3759.74,2817
  Bottom Layer w10: _3.1@3662,3327.57 3662,3269.28 3687,3244.28 3687,3088 3726.32,3048.68 3730,3048.68 3730,3026 3760,2996 3760,2758 v1(3752,2750)
DM3: "R3_Motor 10_1.2" ?.19 _4.1@3913.43,2831 | length 252.8
  Top Layer w10: ?.19@3843,2931.76 3918.24,2931.76 v1(3925,2925)
  Bottom Layer w10: _4.1@3913.43,2831 3931,2848.57 3931,2919 v1(3925,2925) 3956.68,2925 3979.68,2902
DP0: "R3_Motor 9_2.2" ?.1@3467.68,3279 ?.1@3519,3089.24 ?.2@3166.43,3013 | length 719.6
  Top Layer w10: ?.2@3166.43,3013 3248.03,2931.4 3260.7,2931.4 3273.78,2918.32 3311,2918.32 3333.68,2941 3333.68,3019.45 3397.72,3083.49 3475.25,3083.49 3481,3089.24 ?.1@3519,3089.24 3519,3227.68 ?.1@3467.68,3279
DP0PUR: ?.2@3552.32,3279 ?.27 | length 270.4
  Top Layer w10: ?.2@3552.32,3279 3589.32,3242 3671.36,3242 3681.36,3232 3701,3232 3728.24,3204.76 ?.27@3728.24,3141
DP1: "R3_Motor 10.2" ?.12@3665.25,2817 _2.1@3466.43,2933 | length 553.5
  Top Layer w10: ?.12@3665.25,2817 3665.25,2719.75 v1(3675,2710)
  Bottom Layer w10: _2.1@3466.43,2933 3514,2933 3523.59,2942.59 3642.09,2942.59 3695,2889.68 3695,2867 3675,2847 v1(3675,2710)
DP2: "R3_Motor 12.2" ?.16@3791.24,2817 _3.1@3901,3322.57 | length 690.8
  Top Layer w10: ?.16@3791.24,2817 3791.24,2756.76 v1(3798,2750)
  Bottom Layer w10: v1(3798,2750) 3791,2757 3791,2996 3821,3026 3821,3048.68 3821,3067.82 3863.56,3110.38 3863.56,3285.13 _3.1@3901,3322.57
DP3: "R3_Motor 9_1.2" ?.20 _4.1@3962,3090.57 | length 284.9
  Top Layer w10: ?.20@3843,2963.25 3918.25,2963.25 v1(3925,2970)
  Bottom Layer w10: _4.1@3962,3090.57 3925,3053.57 v1(3925,2970) 3956.68,2970 3979.68,2993
DSR: ?.6@5595.52,2138.47 Mez1.87 | length 321.8
  Top Layer w30: Mez1.87@5450,2400 5595.52,2254.48 ?.6@5595.52,2138.47
DSR_2: ?.6@5025,2138.47 Mez1.65 | length 363.3
  Top Layer w30: Mez1.65@4900,2450 4900,2375 5025,2250 ?.6@5025,2138.47
DTR: ?.4@5831.74,1918 Mez1.93 | length 933
  Top Layer w30: ?.4@5831.74,1918 5831.74,1767.26 v2(5833,1766)
  Bottom Layer w30: Mez1.93@5600,2450 5600,2322 5833,2089 v2(5833,1766)
DTR_2: ?.4@5261.22,1918 Mez1.79 | length 790.6
  Top Layer w30: v2(5261,1766) 5261.22,1766.22 ?.4@5261.22,1918
  Bottom Layer w30: Mez1.79@5250,2400 5261,2389 v2(5261,1766)
ExPre: "Holoholo Kai.49" Mez1.100 | length 1593.5
  Top Layer w30: Mez1.100@5750,2600 6156,2600 6850,3294 6850,3500
"EXT PWR": "Makeha i ka Lani.77" "Makeha i ka Lani.78" "Makeha i ka Lani.79" "Makeha i ka Lani.80" "Makeha i ka Lani.81" "Makeha i ka Lani.82" "Makeha i ka Lani.83" "Makeha i ka Lani.84" "Makeha i ka Lani.85" "Makeha i ka Lani.86" "Makeha i ka Lani.87" "Makeha i ka Lani.88" "Makeha i ka Lani.89" Mez2.55 Mez2.57 Mez2.59 Mez2.61 Mez2.63 Mez2.65 Mez2.67 Mez2.69 Mez2.71 Mez2.73 Mez2.75 Mez2.77 Mez2.79 | length 1200
  Top Layer w50: 4650,5691 4750,5691 4850,5691 4950,5691 5050,5691 5150,5691 5250,5691 5350,5691 5450,5691 5550,5691 5650,5691 5750,5691 5850,5691